# EAGLE board USB.BusinessCard (EAGLE 7.6.0)

Size 30 x 90.02 mm. Coordinates in mm from the lower left corner, seen from the top.
Outline: 21,9 21,0 9,0 9,9 2,9 arc-90 0,11 0,88.5 arc-90 2,90 28,90 arc-90 30,88.5 30,11 arc-90 28,9 21,9
Copper layers (1*16): Top 0.035mm / dielectric 1.5mm / Bottom 0.035mm
Design rules "default": minimum track width 10mil, minimum drill 24mil, track to track 8mil, track to pad 8mil, pad to pad 8mil, via to via 8mil, smd to smd 8mil, copper to edge 40mil, drill to drill 8mil, minimum pad ring 10mil, minimum via ring 8mil, stop-mask expansion 4mil, vias tented up to drill 0mil, thermal gap 10mil

## Footprints (pad centres in the part's own frame; a part is rotated, then mirrored left to right if it is on the bottom)
1X12 = drill 1.016 long: 1 -13.97,0; 2 -11.43,0; 3 -8.89,0; 4 -6.35,0; 5 -3.81,0; 6 -1.27,0; 7 1.27,0; 8 3.81,0; 9 6.35,0; 10 8.89,0; 11 11.43,0; 12 13.97,0
USB-A-PCB = smd 7.5 x 1.5: 5V -0.2,-3.5; GND -0.2,3.5 | smd 6.5 x 1: USB_M 0.3,-1; USB_P 0.3,1
1X04 = drill 1.016 long: 1 -3.81,0; 2 -1.27,0; 3 1.27,0; 4 3.81,0
1X06 = drill 1.016 octagon: 1 -6.35,0; 2 -3.81,0; 3 -1.27,0; 4 1.27,0; 5 3.81,0; 6 6.35,0

## Placement (x,y rotation side)
ARDUINO_PRO_MINI_LEFT  [1X12]  8,30 270 top
ARDUINO_PRO_MINI_RIGHT  [1X12]  22.7,30 270 top
JP1  USBPCB  [USB-A-PCB]  15,5 90 top
JP_I2C_OLED_SSD1306  [1X04]  15,53 180 top
JP_PROGRAMMING  [1X06]  2,67.5 90 top
JP_TOP  [1X04]  15.5,44 180 top

## Library data of the parts
ARDUINO_PRO_MINI_LEFT ARDUINO_PRO_MINI_RIGHT JP_PROGRAMMING = adafruit
JP1 = SparkFun-Connectors
JP_I2C_OLED_SSD1306 JP_TOP = pinhead

## Nets
A0: ARDUINO_PRO_MINI_LEFT.5
A1: ARDUINO_PRO_MINI_LEFT.6
A2: ARDUINO_PRO_MINI_LEFT.7
A3: ARDUINO_PRO_MINI_LEFT.8
A4_I2C_SDA: JP_I2C_OLED_SSD1306.4 JP_TOP.1
A5_I2C_SCL: JP_I2C_OLED_SSD1306.3 JP_TOP.2
A6: JP_TOP.3
A7: JP_TOP.4
G2: ARDUINO_PRO_MINI_RIGHT.8
G3: ARDUINO_PRO_MINI_RIGHT.7
G4: ARDUINO_PRO_MINI_RIGHT.6
G5: ARDUINO_PRO_MINI_RIGHT.5
G6: ARDUINO_PRO_MINI_RIGHT.4
G7: ARDUINO_PRO_MINI_RIGHT.3
G8: ARDUINO_PRO_MINI_RIGHT.2
G9: ARDUINO_PRO_MINI_RIGHT.1
G10: ARDUINO_PRO_MINI_LEFT.1
G11_MOSI: ARDUINO_PRO_MINI_LEFT.2 JP_PROGRAMMING.6
G12_MISO: ARDUINO_PRO_MINI_LEFT.3 JP_PROGRAMMING.5
G13_SCK: ARDUINO_PRO_MINI_LEFT.4 JP_PROGRAMMING.4
GND: ARDUINO_PRO_MINI_LEFT.11 JP1.GND JP_I2C_OLED_SSD1306.1 JP_PROGRAMMING.1
GND2: ARDUINO_PRO_MINI_RIGHT.9
RAW: ARDUINO_PRO_MINI_LEFT.12
RST: ARDUINO_PRO_MINI_LEFT.10 JP_PROGRAMMING.3
RST_2: ARDUINO_PRO_MINI_RIGHT.10
RXI: ARDUINO_PRO_MINI_RIGHT.11
TXO: ARDUINO_PRO_MINI_RIGHT.12
VCC: ARDUINO_PRO_MINI_LEFT.9 JP1.5V JP_I2C_OLED_SSD1306.2 JP_PROGRAMMING.2

## Tracks (layer width: path | path; a pad name or v marks a point on that pad's centre or on a via)
A4_I2C_SDA  (1 unrouted)
A5_I2C_SCL  (1 unrouted)
G11_MOSI  (1 unrouted)
G12_MISO  (1 unrouted)
G13_SCK  (1 unrouted)
GND  (3 unrouted)
RST  (1 unrouted)
VCC  (3 unrouted)

## Text on the board
tNames: G11_MOSI | G12_MISO | Frederic Torres / Business Card | Frederic Torres / Business Card | G13_SCK | RST | VCC | GND | A4_I2C_SDA | A5_I2C_SCL | VCC | GND | *A5_I2C_SCL | *A4_I2C_SDA | G10 | G9 | *G11_MOSI | *G8 | *G12_MISO | G7 | *G13_SCK | G6 | A0 | G5 | A1 | G4 | A2 | G3 | A3 | G2 | *VCC | GND | *RST | *RST | *GND | RXI | RAW | TXO | www.FredericTorres.com | www.FredericTorres.com | GND | VCC
bNames: PCB v1 - 2019.10 | https://bit.ly/2J5fCQa | www.FredericTorres.com